# Altium PCB MGMS_PCB.PcbDoc
Units mil, origin at the board's own origin, x right, y up, seen from the top; angles counter-clockwise.
Board outline 2928.21 x 2820 mil, 2 copper layers (Top Layer, Bottom Layer); 40 components, 25 nets, 265 pads, 39 vias.
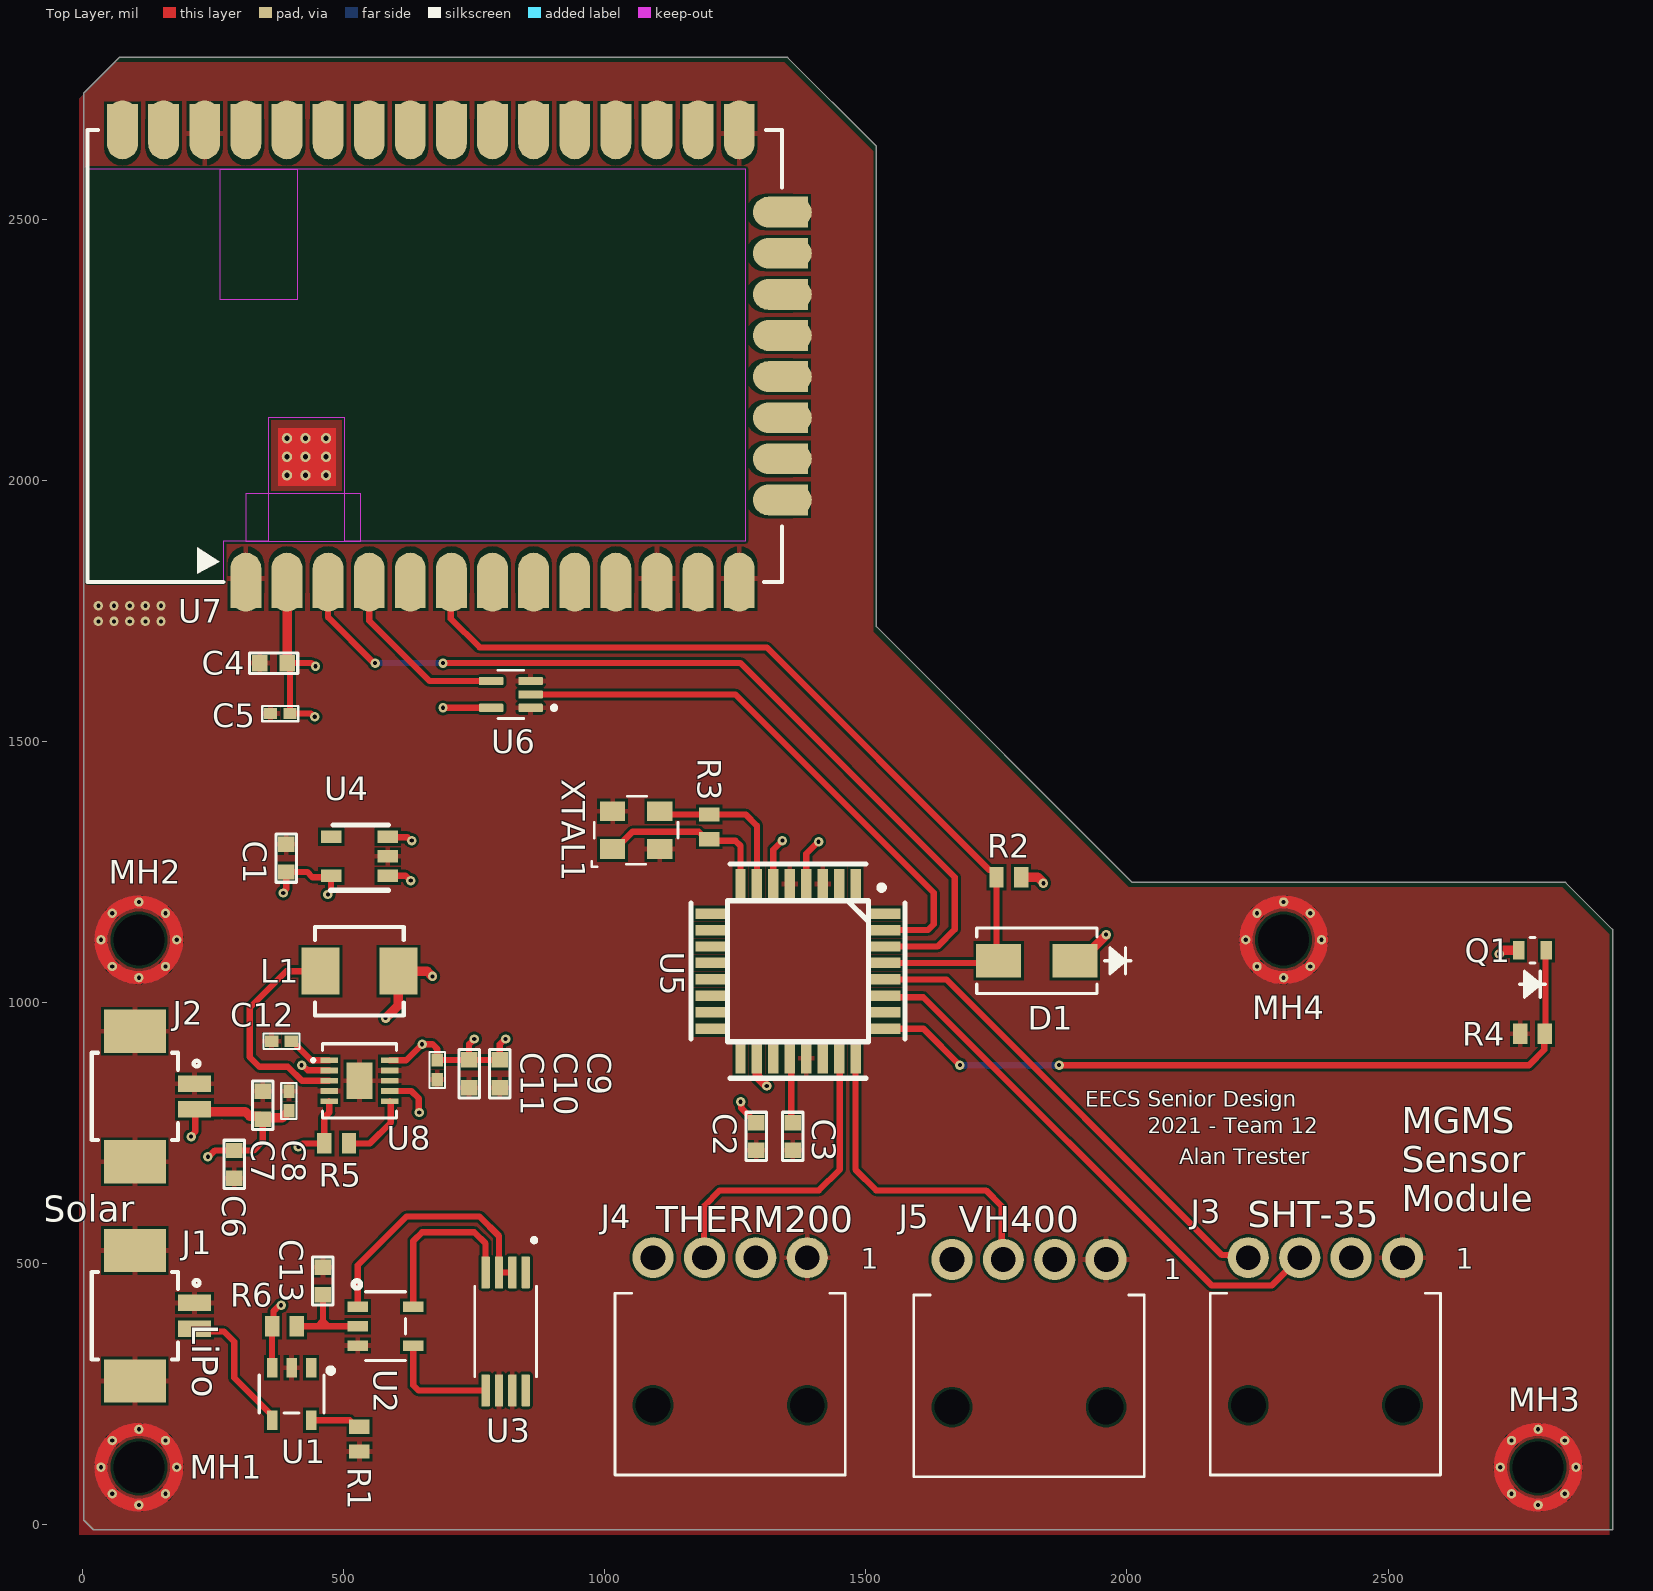
[diagram p0: Top Layer view]
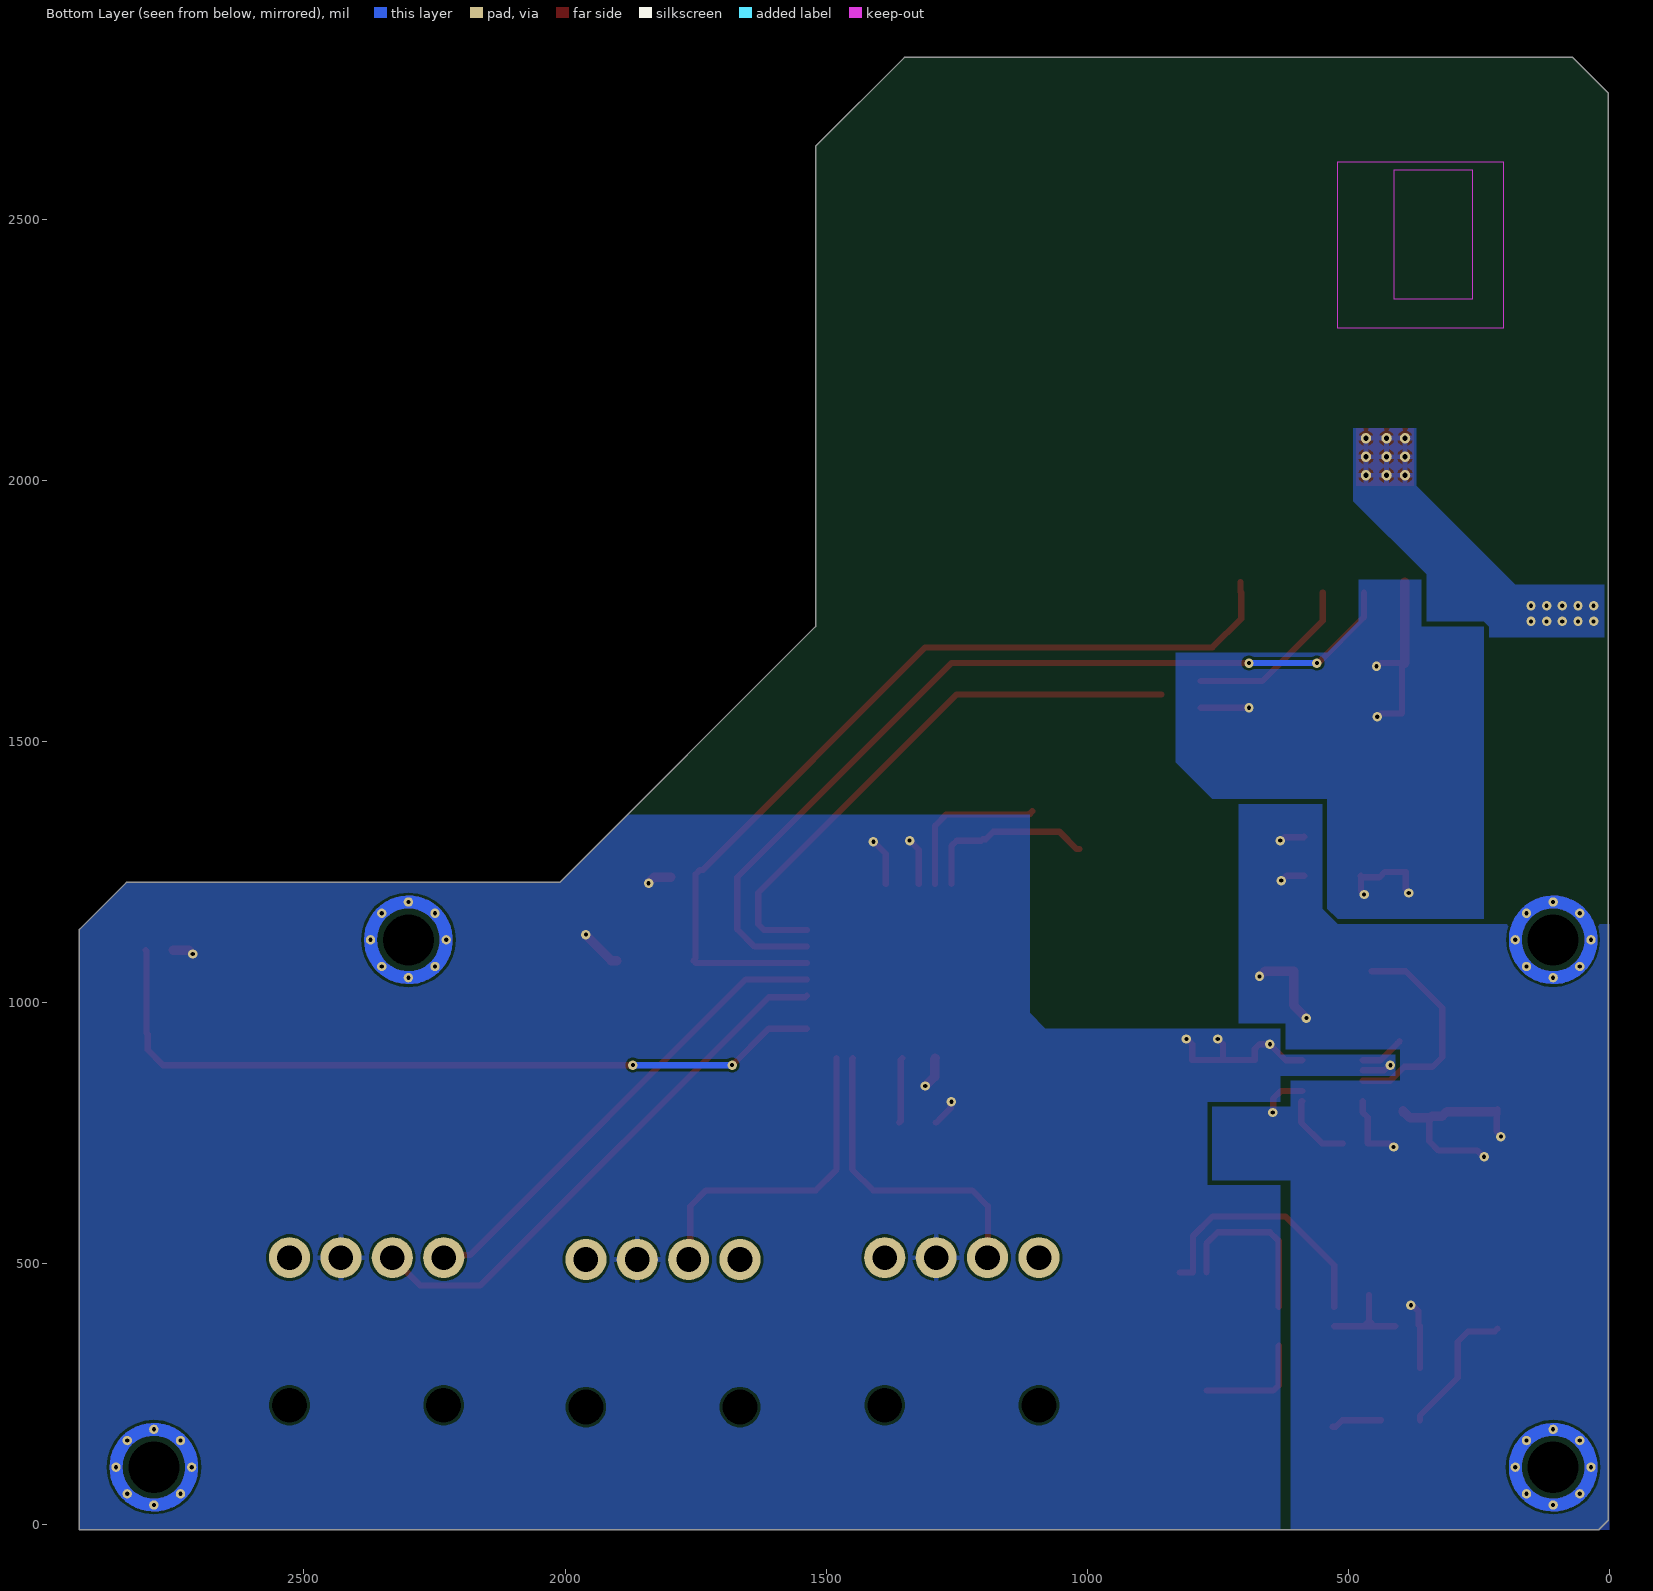
[diagram p1: Bottom Layer view, seen from below]
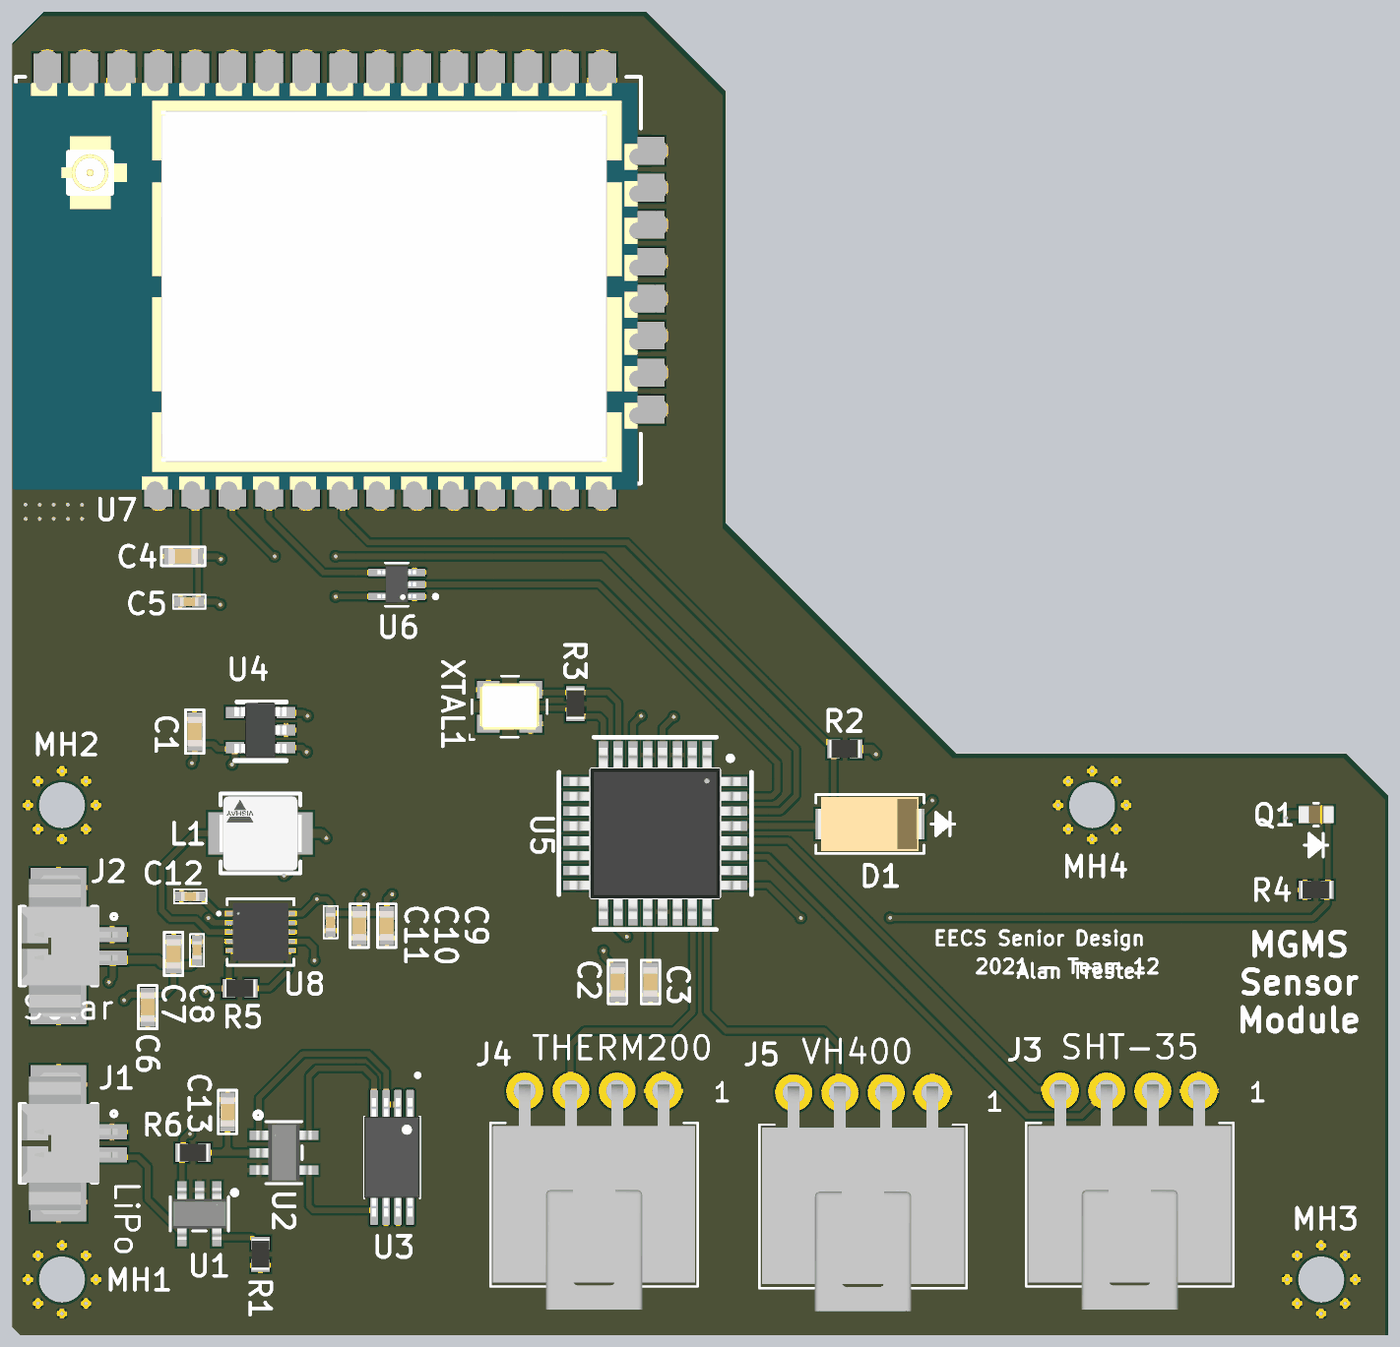
[diagram p2: 3D render of the assembled board from above, using the file's embedded part models]

## Layer stack, top to bottom
Top Solder: solder mask 0.4, Solder Resist, Dk 3.5
Top Layer: signal copper 1.4
Dielectric 1: dielectric 12.6, FR-4, Dk 4.8
Bottom Layer: signal copper 1.4
Bottom Solder: solder mask 0.4, Solder Resist, Dk 3.5

## Board outline
1.79,2741.79 70,2810 1350,2810 1520,2640 1520,1720 2010,1230 2840,1230 2930,1140 2930,-10 20,-10 1.79,8.21

## Design rules (kind name [scope] priority, off if disabled: settings)
AssemblyTestPointUsage [All] p1 off:
AssemblyTestpoint [All] p1 off: testpointundercomponent=TRUE minsize=40 maxsize=100 preferedsize=60 minholesize=0 maxholesize=40 preferedholesize=32 testpointgrid=1 usegrid=TRUE gridtolerance=0.01 allowsidetop=TRUE allowsidebottom=TRUE
Clearance Clearance_TP [InComponent('TP1') Or InComponent('TP2') Or InComponent('TP3') Or InComponent('TP4') Or InComponent('TP5') Or InComponent('TP6') Or InComponent('TP7') Or InComponent('TP8')] p1: gap=5 ignorepadtopadclearanceinfootprint=FALSE except(0: Arc-Hole Track-Hole SMDPad-Hole THPad-Hole Via-Hole Fill-Hole Poly-Hole Region-Hole Text-Hole; 7.8: Track-SMDPad; 8: Track-Track Track-THPad Track-Fill; 25: Track-Poly SMDPad-Poly THPad-Poly)
Clearance Clearance_1 [InNetClass('100_ohm_diff') vs InNetClass('100_ohm_diff')] p2: gap=5 ignorepadtopadclearanceinfootprint=FALSE except(0: Arc-Hole Track-Hole SMDPad-Hole THPad-Hole Via-Hole Fill-Hole Poly-Hole Region-Hole Text-Hole; 5.5: Track-Track; 8: Track-SMDPad Track-THPad Track-Fill; 25: Track-Poly SMDPad-Poly THPad-Poly)
Clearance [All] p3: gap=5 ignorepadtopadclearanceinfootprint=FALSE except(0: Arc-Hole Track-Hole SMDPad-Hole THPad-Hole Via-Hole Fill-Hole Poly-Hole Region-Hole Text-Hole; 8: Track-THPad Track-Fill)
ComponentClearance ComponentClearance_1 [InComponent('MEZZ1')] p1: gap=0 collisioncheckmode=3 verticalgap=0 showdistances=FALSE
ComponentClearance ComponentClearance_TP [HasFootprint('TP-TH-70/40')] p2: gap=0 collisioncheckmode=3 verticalgap=0 showdistances=FALSE
ComponentClearance ComponentClearance_MouseBites [HasFootprint('MB_93MIL_150MIL_31MILx5') vs (InComponent('J20') OR HasFootprint('FIDUCIAL_SM_062'))] p3: gap=0 collisioncheckmode=3 verticalgap=0 showdistances=FALSE
ComponentClearance ComponentClearance_2 [All] p4: gap=10 collisioncheckmode=3 verticalgap=10 showdistances=FALSE
DiffPairsRouting 100_ohm_diff [InNetClass('100_ohm_diff') AND IsDifferentialPair] p1: maxlimit=7.62 minlimit=7.62 mostfreqgap=7.62 toplayer_minwidth=5 toplayer_maxwidth=5 toplayer_prefwidth=5 bottomlayer_minwidth=5 bottomlayer_maxwidth=5 bottomlayer_prefwidth=5 maxuncoupledlength=500
FabricationTestPointUsage [All] p1 off: valid=0 allowmultiple=FALSE
FabricationTestpoint [All] p1 off: side=3 testpointundercomponent=TRUE minsize=40 maxsize=100 preferedsize=60 minholesize=0 maxholesize=40 preferedholesize=32 testpointgrid=1 allowsidetop=TRUE allowsidebottom=TRUE usegrid=TRUE gridtolerance=0.01
HoleSize [All] p1: absolutevalues=TRUE maxlimit=150 minlimit=1 maxpercent=80.000 minpercent=20.000
MinimumSolderMaskSliver [All] p1: minsoldermaskwidth=4
PlaneClearance [All] p1: clearance=5
PlaneConnect [All] p1: planeconnectstyle=Direct reliefexpansion=20 reliefentries=4 reliefconductorwidth=10 reliefairgap=10
PolygonConnect [All] p1: thpad.connectstyle=Relief thpad.reliefconductorwidth=10 thpad.reliefentries=4 thpad.polygonreliefangle="90 Angle" thpad.airgapwidth=5 smdpad.connectstyle=Relief smdpad.reliefconductorwidth=10 smdpad.reliefentries=4 smdpad.polygonreliefangle="90 Angle" smdpad.airgapwidth=5 via.connectstyle=Direct via.reliefconductorwidth=10 via.reliefentries=4 via.polygonreliefangle="90 Angle" via.airgapwidth=5
RoutingCorners [All] p1: cornerstyle=Round minsetback=100 maxsetback=100
RoutingVias [All] p1: holewidth=8 width=18 viastyle="Through Hole" minholewidth=8 minwidth=18 maxholewidth=28 maxwidth=50
SMDToPlane [All] p1: distance=0
SilkToSilkClearance [All] p1 off: silktosilkclearance=10
SilkToSolderMaskClearance [IsPad] p1 off: minsilkscreentomaskgap=5 clearancetoexposedcopper=TRUE
SolderMaskExpansion [All] p1: expansion=2 istentingtop=FALSE
Width [All] p1: maxlimit=150 minlimit=6 preferedwidth=12 minimp=50.000000 maximp=50.000000 favimp=50.000000
17 further rules are at their usual default settings.

## Classes and differential pairs
component class PWR: MH1 MH2 MH3 MH4
component class Circuit: C1 C2 C3 C4 C5 C6 C7 C8 C9 C10 C11 C12 C13 D1 J1 J2 J3 J4 J5 L1 Q1 R1 R2 R3 R4 R5 R6 U1 U2 U3 U4 U5 U6 U7 U8 XTAL1

## Components (designator, comment, footprint, x,y, rotation, side; value= is the part's Value field where it differs from the comment)
C1 "CAP_1.0uF_50V_10%_X7R_0603(1608M)" CAP0603_HD 390,1276.57 r90 top value=1uF
C2 "CAP_100nF_100V_10%_X7R_0603(1608M)" CAP0603_HD 1290,743.43 r270 top value=100nF
C3 "CAP_100nF_100V_10%_X7R_0603(1608M)" CAP0603_HD 1360,743.43 r270 top value=100nF
C4 "CAP_10uF_10V_15%_X5R_0603(1608M)" CAP0603_HD 365.48,1650 r180 top value=10uF
C5 "CAP_0.1uF_25V_10%_X7R_0402(1005M)" CAP0402_HD 378.29,1553.42 r180 top value=0.1uF
C6 "CAP_100nF_100V_10%_X7R_0603(1608M)" CAP0603_HD 290,690 r270 top value=100nF
C7 "CAP_10uF_10V_15%_X5R_0603(1608M)" CAP0603_HD 345,803.19 r90 top value=10uF
C8 "CAP_0.1uF_25V_10%_X7R_0402(1005M)" CAP0402_HD 395,811.06 r90 top value=0.1uF
C9 "CAP_10uF_10V_15%_X5R_0603(1608M)" CAP0603_HD 798.67,863.43 r270 top value=10uF
C10 "CAP_1.0uF_50V_10%_X7R_0603(1608M)" CAP0603_HD 740,863.43 r270 top value=1uF
C11 "CAP_0.1uF_25V_10%_X7R_0402(1005M)" CAP0402_HD 679.09,871.06 r270 top value=0.1uF
C12 "CAP_0.1uF_25V_10%_X7R_0402(1005M)" CAP0402_HD 380.39,925.83 r180 top value=0.1uF
C13 "CAP_100nF_100V_10%_X7R_0603(1608M)" CAP0603_HD 460,466.57 r90 top value=100nF
D1 "Diode_S1B-13-F" SMA_DIODE 1827.24,1080 r180 top
J1 "0532610271" MOLEX_53261-0271 100,820 r270 top
J2 "0532610271" MOLEX_53261-0271 100,400 r270 top
J3 "CON_105313-2304" CON_105313-2304 2380,370 r0 top
J4 "CON_105313-2304" CON_105313-2304 1240,370 r0 top
J5 "CON_105313-2304" CON_105313-2304 1812.36,366.34 r0 top
L1 "IND_2.2uH_WireWound" IND_1616 530,1060 r180 top value=2.2uH
MH1 "MH_2-56_PanHead_CloseFit" MH_2-56_PH 107.5,110 r0 top
MH2 "MH_2-56_PanHead_CloseFit" MH_2-56_PH 107.5,1120 r0 top
MH3 "MH_2-56_PanHead_CloseFit" MH_2-56_PH 2787.5,110 r0 top
MH4 "MH_2-56_PanHead_CloseFit" MH_2-56_PH 2300,1120 r0 top
Q1 "ALS-PT19 Phototransistor" "ALS-PT19 PHOTOTRANSISTOR" 2776.62,1100 r180 top
R1 "RES_1.2K_0.1%_0.1W_0603" RES_0603_HD 530,163.62 r270 top value=1K20
R2 "RES_10.0K_1%_0.33W_0603" RES_0603_HD 1773.62,1240 r180 top value=10K0
R3 "RES_1.00M_0.1%_0.1W_0603" RES_0603_HD 1200,1336.38 r90 top value=1M
R4 "RES_10.0K_1%_0.33W_0603" RES_0603_HD 2776.62,940 r0 top value=10K0
R5 "RES_100K_0.1%_0.1W_0603" RES_0603_HD 486.38,730 r0 top value=100K
R6 "100R" RES_0603_HD 386.38,380 r0 top
U1 "STC4054GR" TSOT-23-5 400,250 r270 top
U2 "AP9101CAK-ABTRG1" SOT-25 580,380 r0 top
U3 "TSM6968DCA" 8-TSSOP 810,370 r270 top
U4 "LP298533DBVR Voltage Regulator" SOT23-5 530,1280 r180 top
U5 "ATMEGA328P_SMD" 32A_ATM 1370,1060 r270 top
U6 "SN74LVC1G125DCKR" SOT-SC70-5 820,1590 r180 top
U7 "XBEE 3 SMD" XBEE_1W_BASE 312.44,1805.12 r90 top
U8 "TPS61200DR Voltage Boost Regulator" "10-VFDFN Exposed Pad" 530,850 r0 top
XTAL1 "CX3225SB16000D0GZJC1" "OSC SMD-4" 1060,1330 r90 top value=16MHz

## Footprints (in the part's own frame and the unit in brackets; to place one, negate y for a bottom-side part, rotate by r counter-clockwise, add the part's x,y. Pads: shape width x height; smd on the part's side, far side on the other; paste and mask are expansions set on the pad)
8-TSSOP [mm]
  rrect25% 1.57x0.41 smd: 1(-2.87,0.975) 2(-2.87,0.325) 3(-2.87,-0.325) 4(-2.87,-0.975) 5(2.87,-0.975) 6(2.87,-0.325) 7(2.87,0.325) 8(2.87,0.975)
  silkscreen extent -4.54,-1.5 2.2,1.5, body extent -3.2,-1.5 3.2,1.5, height 1.2
"10-VFDFN Exposed Pad" [mm] "10 pin qfnish package"
  rect 0.85x0.28 smd paste-0.14: 1(-1.475,1) 2(-1.475,0.5) 3(-1.475,0) 4(-1.475,-0.5) 5(-1.475,-1) 6(1.475,-1) 7(1.475,-0.5) 8(1.475,0) 9(1.475,0.5) 10(1.475,1)
  rect 1.27x1.778 smd paste-0.14: 11(0,0)
  silkscreen extent -2.33,-1.8 1.8,1.8, body extent -1.5,-1.55 1.5,1.55, height 1
32A_ATM [mil] "32 Pin TQFP"
  rect 58x20 smd paste+0 mask+0: 1(-167,110.24) 2(-167,78.74) 3(-167,47.24) 4(-167,15.75) 5(-167,-15.75) 6(-167,-47.24) 7(-167,-78.74) 8(-167,-110.24) 17(167,-110.24) 18(167,-78.74) 19(167,-47.24) 20(167,-15.75) 21(167,15.75) 22(167,47.24) 23(167,78.74) 24(167,110.24)
  rect 20x58 smd paste+0 mask+0: 9(-110.24,-167) 10(-78.74,-167) 11(-47.24,-167) 12(-15.75,-167) 13(15.75,-167) 14(47.24,-167) 15(78.74,-167) 16(110.24,-167) 25(110.24,167) 26(78.74,167) 27(47.24,167) 28(15.75,167) 29(-15.75,167) 30(-47.24,167) 31(-78.74,167) 32(-110.24,167)
  silkscreen extent -205,-205 205,205, body extent -182,-182 182,182, height 47
"ALS-PT19 PHOTOTRANSISTOR" [mil]
  rect 21.75x35 smd paste+0 mask+0: 1(-26.62,0) 2(26.62,0)
  silkscreen extent -25,-24 25,90, body extent -37,-20 37,20, height 24
CAP0402_HD [mm]
  rect 0.65x0.55 smd: 1(-0.475,0) 2(0.475,0)
  silkscreen extent -0.87,-0.38 0.87,0.38, body extent -0.5,-0.25 0.5,0.25, height 0.5
CAP0603_HD [mm]
  rect 0.75x0.8 smd: 1(-0.675,0) 2(0.675,0)
  silkscreen extent -1.17,-0.5 1.17,0.5, body extent -0.8,-0.4 0.8,0.4, height 0.8
CON_105313-2304 [mm] "Nano-Fit™ Right Angle Header, Through Hole, 2.50mm Pitch, Single Row, 4 Circuits, 0.76µm Gold (Au) Plating, Natural"
  round 0 hole 1.7 unplated: 0(-3.75,-3.59) 0(3.75,-3.59)
  round 2 hole 1.2: 1(3.75,3.59) 2(1.25,3.59) 3(-1.25,3.59) 4(-3.75,3.59)
  silkscreen extent -5.6,-6.98 5.6,1.87, body extent -5.47,-8.22 5.47,3.93, height 6.68
IND_1616 [mil] "WireWound"
  rect 73.01x90 smd paste+0 mask+0: 1(-74.5,0) 2(74.5,0)
  silkscreen extent -85,-85 85,85, body extent -115,-89 115,89, height 10
MH_2-56_PH [mil] "Mounting Hole, 2-56 Pan Head, Close Fit"
  round 0 hole 98 unplated mask+36: 0(0,0)
  round 18 hole 8: 1(-72.5,0) 1(-51,-51) 1(-51,51) 1(0,-72.5) 1(0,72.5) 1(51,-51) 1(51,51) 1(72.5,0)
  Top Layer circle w25: c0,0 r72.5
  Bottom Layer circle w25: c0,0 r72.5
MOLEX_53261-0271 [mm]
  rect 0.8x1.6 smd: 1(-0.625,2.9) 2(0.625,2.9)
  rect 2.1x3 smd: P1(-3.175,0) P2(3.175,0)
  silkscreen extent -2.12,-2.1 2.12,3.14, body extent -3.83,-1.99 3.83,3.21, height 3.35
"OSC SMD-4" [mm] "Oscillator Package"
  rect 0.97x1.22 smd: 1(-0.92,1.145) 2(-0.92,-1.145) 3(0.92,-1.145) 4(0.92,1.145)
  silkscreen extent -1.78,-2.03 1.65,2.16, body extent -1.25,-1.6 1.25,1.6, height 0.6
RES_0603_HD [mm] "Chip Resistor, 2-Leads, Body 0603, IPC High Density"
  rect 0.7x1 smd: 1(-0.6,0) 2(0.6,0)
  body extent -0.82,-0.47 0.83,0.48, height 0.5
SMA_DIODE [mm]
  rect 2.18x1.63 smd paste+0 mask+0: 1(-1.857,0) 2(1.857,0)
  silkscreen extent -4.57,-1.59 2.92,1.59, body extent -2.79,-1.46 2.8,1.46, height 2.35
SOT23-5 [mm] "SOT23-5"
  rect 1x0.6 smd paste+0 mask+0.051: 1(-1.375,0.95) 2(-1.375,0) 3(-1.375,-0.95) 4(1.375,-0.95) 5(1.375,0.95)
  silkscreen extent -1.4,-1.52 1.4,1.65, body extent -1.42,-1.5 1.42,1.5, height 1.2
SOT-25 [mil]
  rect 39.5x20 smd paste+0 mask+0: 1(-53.25,37) 2(-53.25,0) 3(-53.25,-37) 4(53.25,-37.5) 5(53.25,37.5)
  silkscreen extent -62,-66 38,87, body extent -59,-61 59,61, height 51
SOT-SC70-5 [mm]
  rrect25% 1.19x0.4 smd: 1(-0.96,0.65) 2(-0.96,0) 3(-0.96,-0.65) 4(0.96,-0.65) 5(0.96,0.65)
  silkscreen extent -2.2,-1.17 0.63,1.17, body extent -1.05,-1.02 1.05,0.98, height 1.1
TSOT-23-5 [mil]
  rect 37.5x20 smd paste+0 mask+0: 1(-50.25,37.4) 2(-50.25,0) 3(-50.25,-37.4) 4(50.25,-37.4) 5(50.25,37.4)
  silkscreen extent -50,-62 37,80, body extent -55,-57 55,57, height 43
XBEE_1W_BASE [mm]
  rect 1.5x1.5 smd: 1(-0.508,0) 2(-0.508,-2) 3(-0.508,-4) 4(-0.508,-6) 5(-0.508,-8) 6(-0.508,-10) 7(-0.508,-12) 8(-0.508,-14) 9(-0.508,-16) 10(-0.508,-18) 11(-0.508,-20) 12(-0.508,-22) 13(-0.508,-24) 14(3.998,-26.608) 15(5.998,-26.608) 16(7.998,-26.608) 17(9.998,-26.608) 18(11.998,-26.608) 19(13.998,-26.608) 20(15.998,-26.608) 21(17.998,-26.608) 22(22.508,-24) 23(22.508,-22) 24(22.508,-20) 25(22.508,-18) 26(22.508,-16) 27(22.508,-14) 28(22.508,-12) 29(22.508,-10) 30(22.508,-8) 31(22.508,-6) 32(22.508,-4) 33(22.508,-2) 34(22.508,0) 35(22.508,2) 36(22.508,4) 37(22.5,6)
  oval 2.86x1.5 smd: 1(0,0) 2(0,-2) 3(0,-4) 4(0,-6) 5(0,-8) 6(0,-10) 7(0,-12) 8(0,-14) 9(0,-16) 10(0,-18) 11(0,-20) 12(0,-22) 13(0,-24) 22(22,-24) 23(22,-22) 24(22,-20) 25(22,-18) 26(22,-16) 27(22,-14) 28(22,-12) 29(22,-10) 30(22,-8) 31(22,-6) 32(22,-4) 33(22,-2) 34(22,0) 35(22,2) 36(22,4) 37(22,6)
  oval 1.5x2.86 smd: 14(3.998,-26.1) 15(5.998,-26.1) 16(7.998,-26.1) 17(9.998,-26.1) 18(11.998,-26.1) 19(13.998,-26.1) 20(15.998,-26.1) 21(17.998,-26.1)
  round 0.508 hole 0.254: 38(5.2,-3.9) 38(5.2,-2.9) 38(5.2,-2) 38(6.1,-3.9) 38(6.1,-2.9) 38(6.1,-2) 38(7,-3.9) 38(7,-2.9) 38(7,-2)
  round 0.2 smd: 38(6.2,-2.9)
  Top Layer region: 4.699,-4.369 7.493,-4.369 7.493,-1.575 4.699,-1.575
  Top Layer keep-out region: 2,0 2,-5.6 4.3,-5.6 4.3,0
  Top Layer keep-out region: 0,7.7 20.1,7.7 20.1,-24.3 2,-24.3 2,-4.8 8,-4.8 8,-1.1 2,-1.1 2,1.1 0,1.1
  Bottom Layer keep-out region: 20.422,2.794 20.422,-5.309 12.37,-5.309 12.37,2.794
  Keep-Out Layer region: 13.75,1.27 13.75,-2.515 20.066,-2.515 20.066,1.27
  silkscreen extent 0,-26.09 22,7.7, body extent -0.33,-25.91 21.67,7.88, height 3.11

## Part data
C1 C10: "CAP, 1.0uF, 50V, 10%, X7R, 0603(1608M)", Supplier Part Number 1=587-3247-1-ND, Temperature Characteristics=X7R, Tolerance=10%, Voltage=50V, MANF="Taiyo Yuden", MANF P/N=UMK107AB7105KA-T, Supplier 1=Digi-Key, Supplier 2=Mouser, Supplier Part Number 2=963-UMK107AB7105KA-T
C2 C3 C6 C13: "CAP, 100nF, 100V, 10%, X7R, 0603(1608M)", Temperature Characteristics=X7R, Tolerance=10%, Voltage=100V, ALT MANF=AVX, ALT MANF P/N=06031C104KAT2A, MANF=Murata, MANF P/N=GCJ188R72A104KA01D
C4 C7 C9: "CAP, 10uF, 10V, 15%, X5R, 0603(1608M)", Supplier Part Number 1=490-10474-2-ND, Temperature Characteristics=X5R, Tolerance=15%, MANF=Murata, MANF P/N=GRM188R61A106KE69D, Supplier 1=Digi-Key, Supplier 2=Mouser, Supplier Part Number 2=81-GRM188R61A106KE9D
C5 C8 C11 C12: "CAP, 0.1uF, 25V, 10%, X7R, 0402(1005M)", Supplier Part Number 1=1276-6720-2-ND, Temperature Characteristics=X7R, Tolerance=10%, Voltage=25V, MANF=Samsung, MANF P/N=CL05B104KA5NNNC, Supplier 1=Digi-Key
D1: Part Number=S1B-13-F, Supplier Part Number 1=S1B-FDICT-ND, Supplier 1=Digi-Key
J1 J2: "2 Pos Molex Microblade", Supplier Part Number 1=WM7620CT-ND, Part Number=0532610271, Supplier 1=Digi-Key
J3 J4 J5: "Connector, 2.5MM, 4 pos Singlel Row Header - Right Angle", MANF=Molex, MANF P/N=105313-2304
L1: "Inductor SMT, 27nH, Wire-wound Ceramic, 0402HP", Supplier Part Number 1=994-0402HP-27NXJLU, INDUSTRY_STD_PKG_TYPE=0402HP, MANF=COILCRAFT, MANF P/N=0402HP-27NXJLU, Supplier 1=Mouser, Supplier 2=Farnell, Supplier Part Number 2=2285846
MH1 MH2 MH3 MH4: "Mounting Hole, 2-56 Pan Head, Close Fit Hole", ClassName="Mounting Holes", MANF=None, MANF P/N=NP, Part Field 1=NP, Part Field 2=NP
Q1: Supplier Part Number 1=1080-1244-1-ND, Pat Number=ALS-PT19, Supplier 1=Digi-Key
R1: Power=0.05W, Supplier Part Number 1=P1.2KDBCT-ND, Tolerance=1%, MANF=PANASONIC, MANF P/N=ERJ-1GNF1201C, Supplier 1=Digi-Key
R2 R4: Power=0.33W, Supplier Part Number 1=541-10.0KSCT-ND, Tolerance=1%, ALT MANF="KOA Speer", ALT MANF P/N=SG73P1JTTD1002F, MANF=Vishay/Dale, MANF P/N=CRCW060310K0FKEAHP, Supplier 1=Digi-Key
R3: Power=0.05W, Supplier Part Number 1=YAG4498CT-ND, Tolerance=1%, MANF=PANASONIC, MANF P/N=ERJ-1GNF1004C, Supplier 1=Digi-Key
R5: Power=0.05W, Supplier Part Number 1=P122695CT-ND, Tolerance=1%, MANF=PANASONIC, MANF P/N=ERJ-1GNF1203C, Supplier 1=Digi-Key
R6: library part RES_100_0.5%_1/16W_0603, Power=0.05W, Supplier Part Number 1=RR08P100DCT-ND, Tolerance=1%, MANF=Vishay, MANF P/N=CRCW020115K0FKED, Supplier 1=Digi-Key
U1: "800mA Standalone linear Li-ion charger with thermal regulation", Supplier Part Number 1=497-5809-1-ND, Part Number=STC4054GR, Supplier 1=Digi-Key
U2: "Battery Protection IC for LiPo", Part Number=AP9101CAK, Supplier Part Number 1=AP9101CAK-ABTRG1DICT-ND, Supplier 1=Digi-Key
U3: Supplier Part Number 1=TSM6968DCARVGCT-ND, Parameter 1=TSM6968, Supplier 1=Digi-Key
U4: "Arduino 3.3v regulator", Part Number=LP298533, Supplier Part Number 1=296-24263-1-ND, Supplier 1=Digi-Key
U5: "Arduino ATMEGA328 Chip", Part Number=ATMEGA328P, Supplier Part Number 1=ATMEGA328P-AURCT-ND, Supplier 1=Digi-Key
U6: "Single Bus 3-State Buffer", Part Number=SN74LVC1G125, Supplier Part Number 1=296-11603-1-ND, Supplier 1=Digi-Key
U7: Part Number="Digi XBEE 3", Supplier Part Number 1=602-2200-ND, Supplier 1=Digi-Key
U8: "Used on Pololu step up regulator board", Part Number=TPS61200DR, Supplier Part Number 1=296-21663-1-ND, Supplier 1=Digi-Key
XTAL1: "16MHz Oscillator", Supplier Part Number 1=1253-1698-1-ND, Supplier 1=Digi-Key

## Via types
v1: diameter 18, hole 8, Top Layer to Bottom Layer, tented both sides, 39 vias

## Nets (pads, with @x,y where several pads share a name; then routed paths per layer and width w, separated by ;. In a path a pad name is that pad's centre, name@x,y a point inside that pad or via, vN(x,y) a via of type N, cw(c..) or ccw(c..) an arc to the next point about the centre after c; other vN are vias at no path point)
3V3: C1.1 C4.1 C5.1 U4.5 U6.5 U7.2 | length 624.9
  Top Layer w12: v1(384.07,1209.63) 384.07,1211.25 390,1217.19 C1.1 430,1250 440,1240 473.27,1240 U4.5@475.45,1242.18 ; U7.2@390,1803.94 U7.2@391.18,1805.12 ; v1(444.41,1547.18) 442.79,1547.18 436.55,1553.42 C5.1 396.99,1645.06 C4.1 438.29,1650 444.23,1644.07 v1(445.85,1644.07) ; v1(469.51,1206.85) 469.51,1208.48 475.45,1214.41 U4.5@475.45,1242.18 ; U4.5 U4.5@475.45,1242.18 ; v1(690.08,1564.38) U6.5
  Top Layer w18: C4.1 U7.2@392.05,1804.53
+5: C2.1 C9.1 C10.1 C11.1 D1.1 J3.2 J4.2 J5.2 Q1.2 R2.1 U5.4 U5.6 U5.18 U8.2 U8.10 | length 859.5
  Top Layer w12: v1(419.15,879.96) 420.78,879.96 430.74,870 471.61,870 U8.2 ; U8.10 619.37,889.37 v1(650,920) 670,920 679.09,910.91 C11.1 679.21,889.88 739.88,889.88 C10.1 ; v1(750,930) 749.8,930 740,920.2 C10.1 ; v1(810,930) 808.47,930 798.67,920.2 C9.1 C10.1 ; v1(1260,810) 1261.15,808.85 1261.15,797.87 1280.25,778.76 1289.02,770 C2.1 ; U5.6 1322.76,1292.76 v1(1340,1310) ; U5.4 1385.75,1284.95 1408.73,1307.93 v1(1409.43,1307.93)
  Top Layer w18: U5.18 1292.26,892 1292.26,857.74 v1(1310,840) ; R2.1 1829.46,1240 1840,1229.46 v1(1840,1228.27) ; D1.1 1911.2,1080 1960,1128.8 v1(1960,1130) ; v1(2713.05,1092.86) 2720.19,1100 Q1.2
GND: C1.2 C2.2 C3.2 C4.2 C5.2 C6.2 C7.2 C8.2 C9.2 C10.2 C11.2 C12.2 C13.2 J1.1 J1.P1 J1.P2 J2.1 J2.P1 J2.P2 J3.1 J4.1 J5.1 MH1.1 MH2.1 MH3.1 MH4.1 R1.2 R4.1 U1.2 U2.3 U3.6 U3.7 U4.2 U5.3 U5.5 U5.21 U6.1 U6.3 U7.1 U7.11 U7.13 U7.22 U7.35 U7.38 U8.4 U8.8 U8.9 U8.11 XTAL1.2 XTAL1.4
  other v1: 30,1730 60,1730 90,1730 120,1730 150,1730 30,1760 60,1760 90,1760 120,1760 150,1760
NetC3_1: C3.1 U5.20 | length 125.4
  Top Layer w12: U5.20 1357.13,890.13 1357.13,772.87 C3.1
NetC12_1: C12.1 U8.1 | length 85.8
  Top Layer w12: C12.1@401.57,925.83 401.57,925.32 405.89,921 406.4,921 438.03,889.37 U8.1
NetC13_1: C13.1 R6.2 U2.2 | length 195
  Top Layer w12: R6.2 450,380 ; C13.1 460,390 ; 470,380 460,390 ; U2.2 450,380 ; 450,380 460,390
NetD1_2: D1.2 R2.2 U5.29 U7.6 | length 1704.6
  Top Layer w12: U7.6@706.14,1805.12 706.14,1786.14 705.07,1785.07 705.07,1734.93 760,1680 1310,1680 1736.31,1253.69 1742.22,1253.69 1750,1245.91 R2.2 1750,1084.13 D1.2 1749.87,1075.75 U5.29
NetJ2_2: J2.2 U1.4 | length 266.7
  Top Layer w12: J2.2 219.57,370 270,370 290,350 290,281.1 362.6,208.5 U1.4
NetJ3_3: J3.3 U5.27 | length 1045.7
  Top Layer w12: U5.27 1539.76,1010 1610,1010 2162.03,457.97 2277.42,457.97 J3.3
NetJ3_4: J3.4 U5.28 | length 916.1
  Top Layer w12: U5.28 1654.03,1044.25 2182.02,516.26 2227.44,516.26 J3.4
NetJ4_3: J4.3 U5.23 | length 601.5
  Top Layer w12: J4.3 1190,512.13 1190,610 1220,640 1410,640 1450,680 1450,891.74 U5.23
NetJ5_3: J5.3 U5.24 | length 625.7
  Top Layer w12: U5.24 1480,892.76 1480,680 1520,640 1730,640 1760,610 1760,510.83 J5.3
NetL1_2: L1.2 U8.3 | length 429.8
  Top Layer w12: L1.2 390,1060 319.97,989.97 319.97,895.49 338.37,877.09 392.91,877.09 420,850 U8.3
NetQ1_1: Q1.1 R4.2 U5.25 | length 1495.7
  Top Layer w12: U5.25 1610.24,949.76 v1(1680,880) ; v1(1870,880) 2770,880 2799.34,909.34 2799.34,939.1 2801.75,941.5 2801.75,1098.5 Q1.1
  Bottom Layer w12: v1(1680,880) v1(1870,880)
NetR1_1: R1.1 U1.5 | length 97.8
  Top Layer w12: U1.5 511.59,199.75 524.09,187.24 R1.1
NetR3_1: R3.1 U5.8 XTAL1.1 | length 342.8
  Top Layer w12: XTAL1.1 1019.84,1293.78 1052.94,1326.87 1179.98,1326.87 1194.09,1312.76 R3.1 1202.76,1310 1250,1310 1259.76,1300.24 U5.8
NetR3_2: R3.2 U5.7 XTAL1.3 | length 309.3
  Top Layer w12: XTAL1.3 1111.3,1360 R3.2 1270,1360 1291.26,1338.74 U5.7
NetR5_2: R5.2 U8.6 | length 138.8
  Top Layer w12: R5.2 550,730 590,770 590,810.14 589.51,810.63 U8.6
NetU2_1: U2.1 U3.2 U3.3 | length 499.6
  Top Layer w12: U2.1 526.75,496.75 620,590 760,590 797.2,552.8 U3.3 U3.2
NetU2_4: U2.4 U3.5 | length 218.1
  Top Layer w12: U2.4 633.25,266.75 642.99,257.01 U3.5
NetU2_5: U2.5 U3.4 | length 335.4
  Top Layer w12: U2.5 633.25,543.25 650,560 750,560 771.61,538.39 U3.4
NetU5_30: U5.30 U7.3 | length 1700.1
  Top Layer w12: U7.3@469.92,1785.12 469.92,1737.91 556.68,1651.15 558.85,1651.15 v1(560,1650) ; v1(690,1650) 1260,1650 1670,1240 1670,1140 1637.24,1107.24 U5.30
  Bottom Layer w12: v1(560,1650) v1(690,1650)
NetU5_31: U5.31 U6.2 | length 1087.3
  Top Layer w12: U6.2 1250,1590 1630,1210 1630,1150 1618.74,1138.74 U5.31
NetU6_4: U6.4 U7.4 | length 335.3
  Top Layer w12: U7.4@548.66,1785.12 548.66,1731.34 664.41,1615.59 U6.4
V_in: C6.1 C7.1 C8.1 J1.2 L1.1 R5.1 R6.1 U1.3 U4.1 U4.3 U8.5 U8.7 | length 1029.4
  Top Layer w12: v1(207.59,743.22) 207.59,744.84 215.52,752.77 215.52,785.65 214.17,786.99 J1.2@214.17,791.12 ; J1.2 J1.2@218.44,791.12 ; v1(239.65,704.57) 241.27,704.57 253.21,716.51 289.93,716.51 C6.1 327.25,716.57 345,734.33 C7.1 ; 264.78,791.12 268.88,791.12 ; U1.3 362.68,300.33 362.68,379.92 R6.1 365.39,382.64 365.39,408.85 375.4,418.85 378.85,418.85 v1(380,420) ; v1(413.03,723.25) 414.65,723.25 421.4,730 R5.1 462.76,780.09 472.05,789.38 471.93,789.49 U8.5 ; U4.1 618.34,1242.6 627.55,1233.39 v1(628.14,1233.39) ; U4.3 584.98,1316.56 621.82,1316.56 628.38,1310 v1(630,1310) ; U8.7 629.68,830.32 643.71,816.29 643.71,790.21 v1(644.64,789.29)
  Top Layer w18: J1.2@218.44,791.12 264.78,791.12 ; 268.88,791.12 311.12,791.12 319.87,782.38 339.24,782.38 C7.1 347.44,779.05 381.69,779.05 391.2,788.57 393.17,788.57 395,790.39 C8.1 ; v1(580,970) 604.5,994.5 L1.1 660,1060 v1(670,1050)
pads on no net: J3.0 J4.0 J4.4 J5.0 J5.4 MH1.0 MH2.0 MH3.0 MH4.0 U1.1 U3.1 U3.8 U4.4 U5.1 U5.2 U5.9 U5.10 U5.11 U5.12 U5.13 U5.14 U5.15 U5.16 U5.17 U5.19 U5.22 U5.26 U5.32 U7.5 U7.7 U7.8 U7.9 U7.10 U7.12 U7.14 U7.15 U7.16 U7.17 U7.18 U7.19 U7.20 U7.21 U7.23 U7.24 U7.25 U7.26 U7.27 U7.28 U7.29 U7.30 U7.31 U7.32 U7.33 U7.34 U7.36 U7.37

## Polygon pours and split planes (outlines as drawn)
3V3 on Bottom Layer "3V3_L02_P003" (solid, pour order 3): 240,1720 360,1720 360,1810 480,1810 480,1730 540,1670 830,1670 830,1460 760,1390 540,1390 540,1180 520,1160 240,1160
+5 on Bottom Layer "+5_L02_P001" (solid, pour order 1): 1110,1360 1880,1360 2010,1230 2840,1230 2930,1140 2930,-10 630,-10 630,650 770,650 770,810 630,810 630,860 410,860 410,900 630,900 630,950 1080,950 1110,980
GND on Bottom Layer "GND_L02_P010" (solid, pour order 10): 490,2100 370,2100 370,1990 180,1800 10,1800 10,1700 230,1700 230,1720 240,1730 350,1730 350,1820 490,1960
V_in on Bottom Layer "Bottom Layer-V_in" (solid, pour order 6): 760,660 610,660 610,-10 0,-10 0,1150 520,1150 550,1180 550,1380 710,1380 710,960 620,960 620,910 400,910 400,850 610,850 610,800 760,800
GND on Top Layer "GND_L01_P000" (solid, remove dead copper, pour order 0): -6.29,-19.57 2923.71,-19.57 2923.71,1130.43 2833.71,1220.43 2003.71,1220.43 1513.71,1710.43 1513.71,2630.43 1343.71,2800.43 63.71,2800.43 -6.29,2730.43

## Silkscreen, mask and mechanical layers (free items; w line width, h text height)
Top Overlay:
  text "EECS Senior Design" at 1920,800 h30
  text "2021 - Team 12" at 2039.78,750 h30
  text "Alan Trester" at 2100,690 h30
  text "MGMS / Sensor / Module" at 2526.27,600 h50
  text "Solar" at -77.6,580 h50
  text "SHT-35" at 2231.2,570 h50
  text "THERM200" at 1098.4,560 h50
  text "VH400" at 1677.37,560 h50
  text "LiPo" at 210,383.46 h50 r270

## Text inside footprints (layer, text, board x,y; h text height)
J3: Top Assembly "1" at 2520.75,446.77 h30; Top Overlay "1" at 2630,490 h39.37
J4: Top Assembly "1" at 1380.75,446.77 h30; Top Overlay "1" at 1490,490 h39.37
J5: Top Assembly "1" at 1953.11,443.11 h30; Top Overlay "1" at 2070,470 h39.37
U7: Top Assembly "1" at 341,1864.17 h50 r90; Top Assembly "21" at 1284.57,2489.68 h50 r90; Top Assembly "37" at 103.78,2553.15 h50 r90; Top Assembly "14" at 1284.57,1934.57 h50 r90; Top Courtyard "1" at 341,1864.17 h50 r90; Top Courtyard "21" at 1284.57,2489.68 h50 r90; Top Courtyard "37" at 103.78,2553.15 h50 r90; Top Courtyard "14" at 1284.57,1934.57 h50 r90